# Altium PCB Plug Base.PcbDoc
Units mm, origin at the board's own origin, x right, y up, seen from the top; angles counter-clockwise.
Board outline 28.99 x 33 mm, 2 copper layers (Top Layer, Bottom Layer); 12 components, 9 nets, 44 pads, 7 vias.
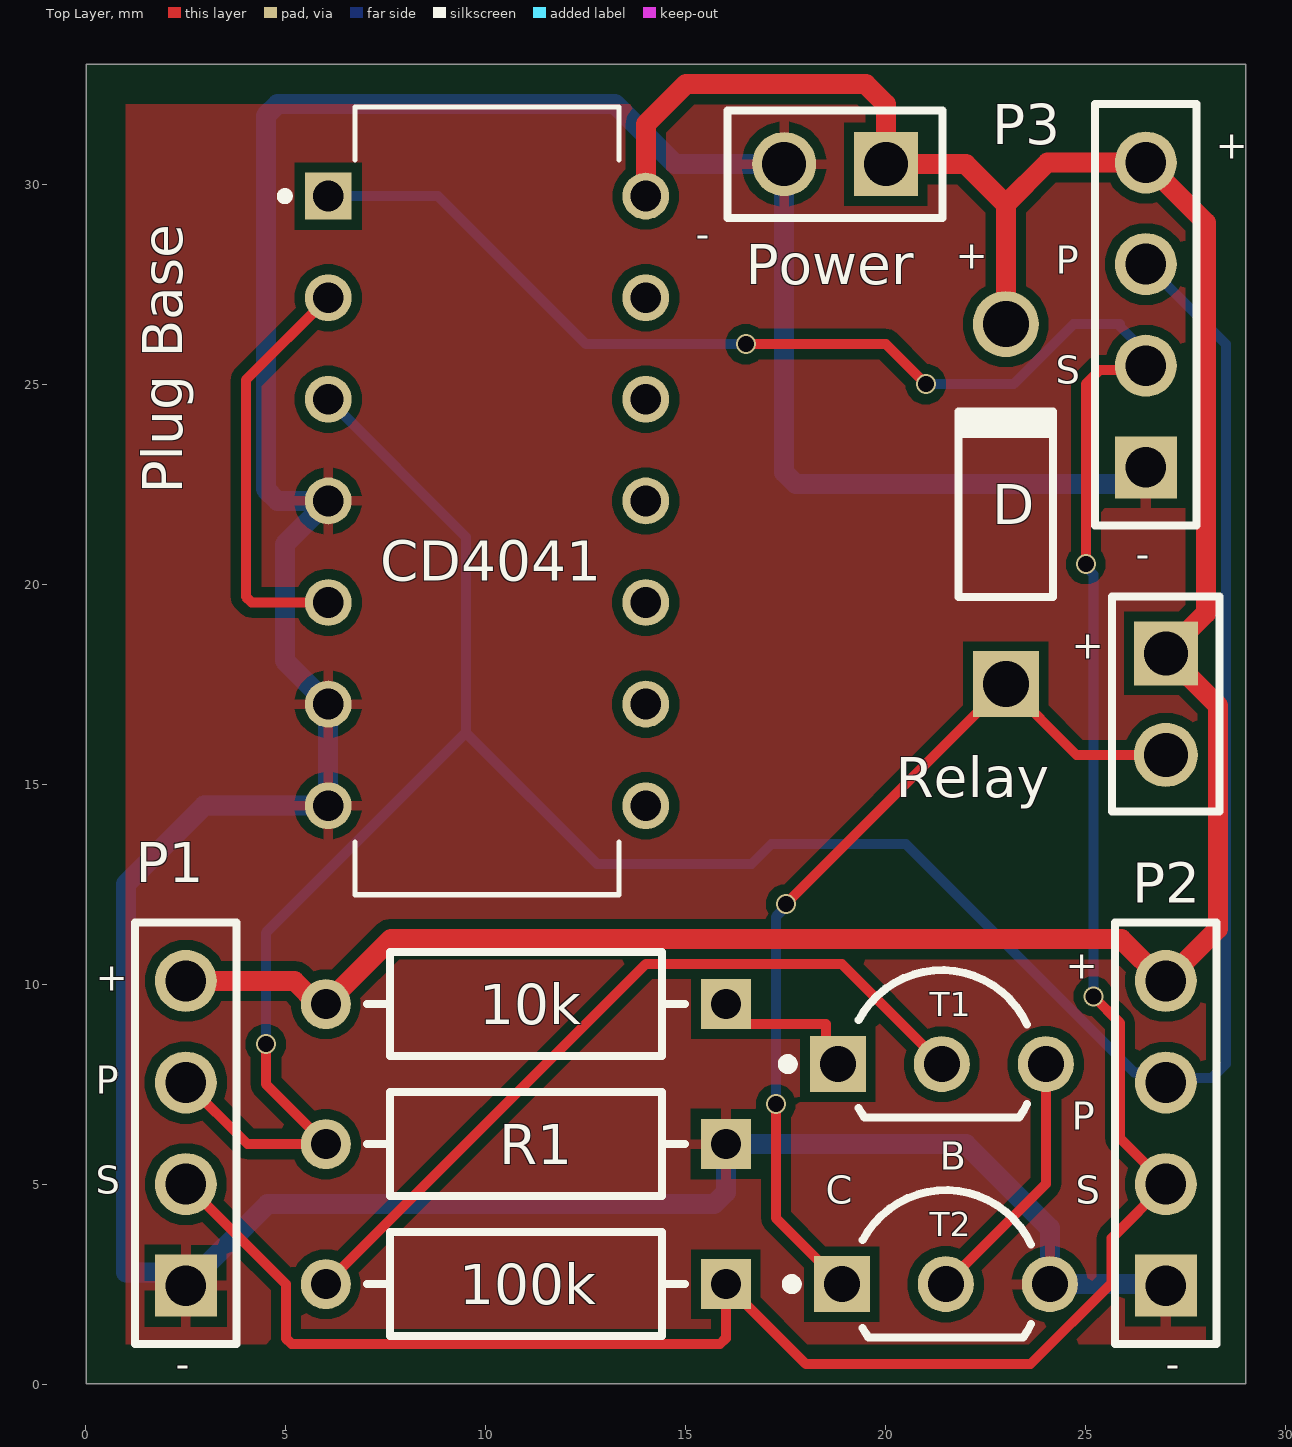
[diagram p0: Top Layer view]
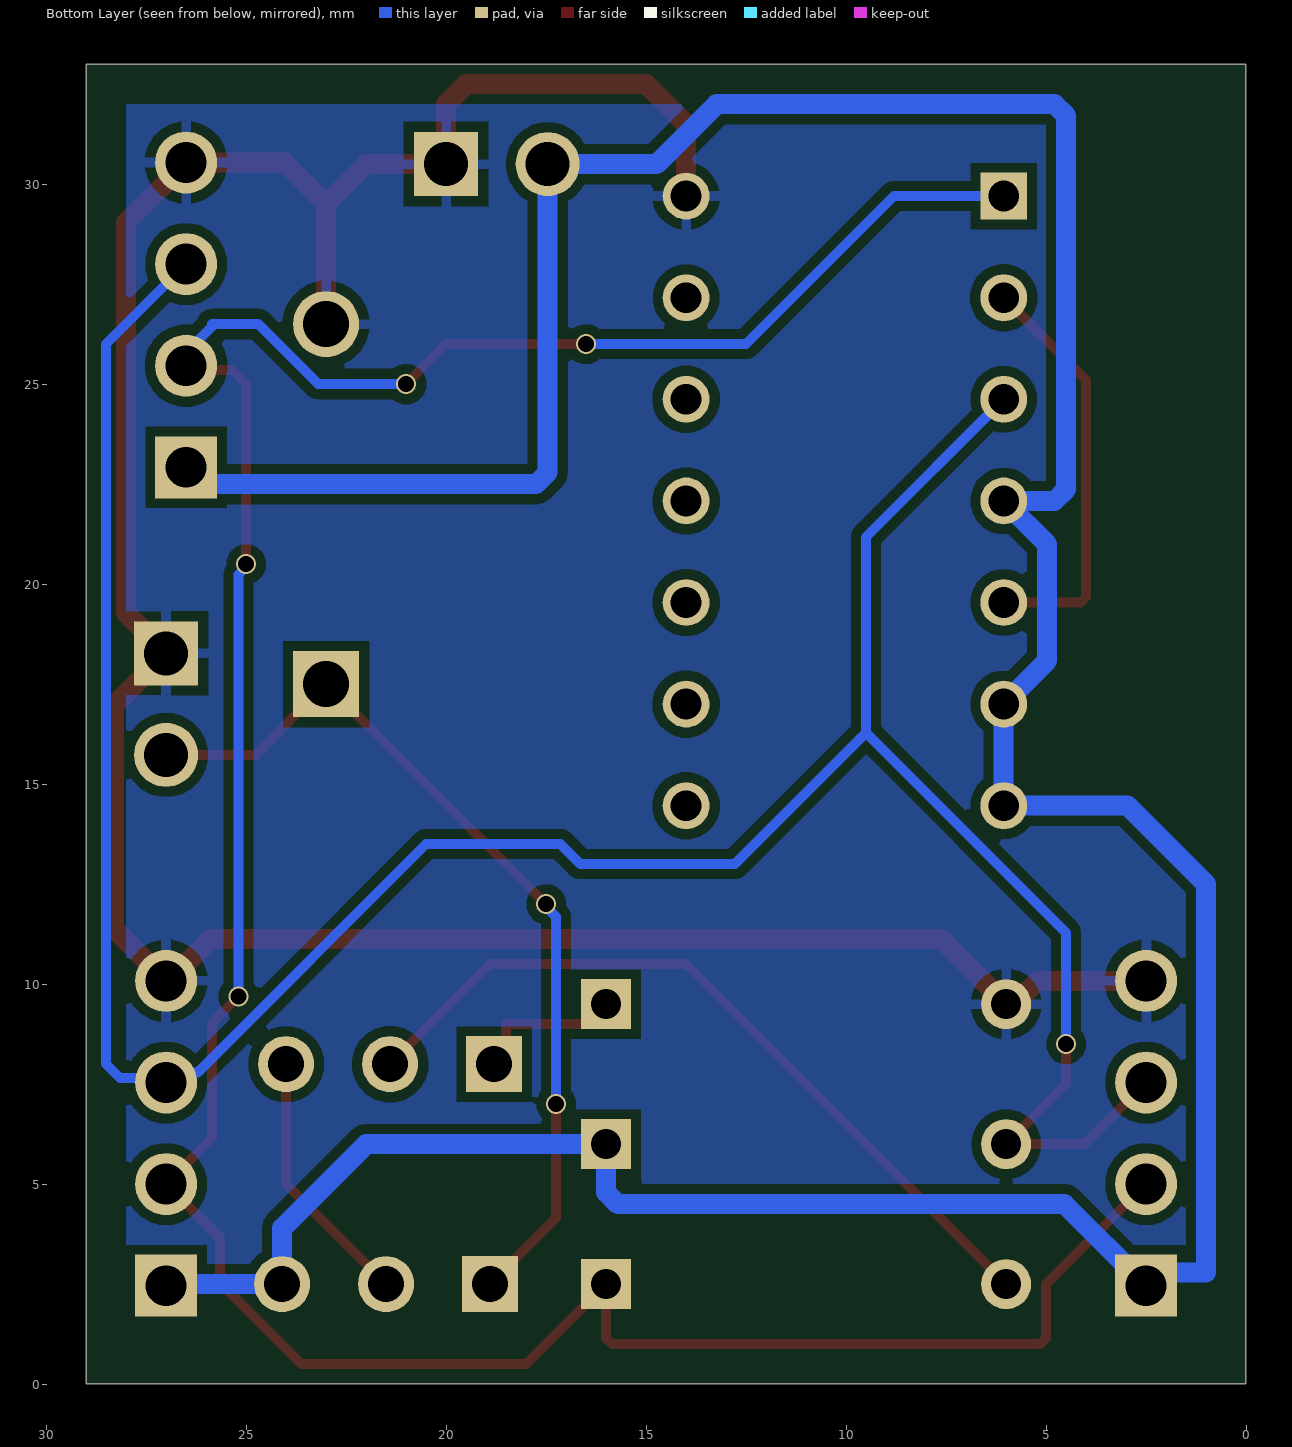
[diagram p1: Bottom Layer view, seen from below]
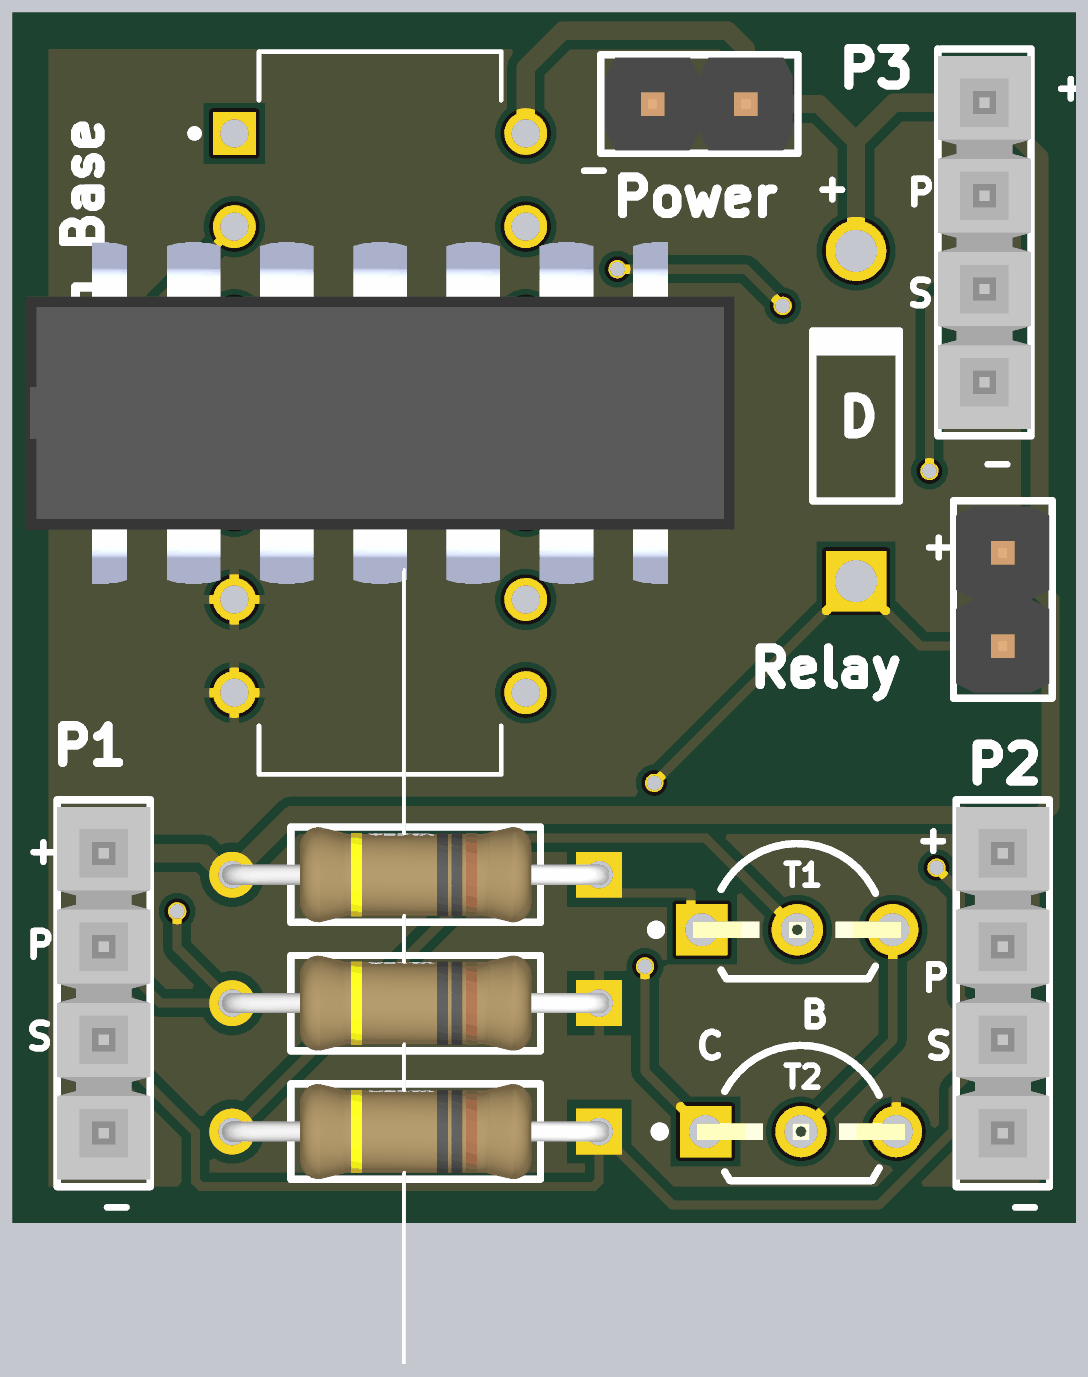
[diagram p2: 3D render of the assembled board from above, using the file's embedded part models]

## Layer stack, top to bottom
Top Solder: solder mask 0.0102, Solder Resist, Dk 3.5
Top Layer: signal copper 0.0356
Dielectric 1: dielectric 0.32, FR-4, Dk 4.8
Bottom Layer: signal copper 0.0356
Bottom Solder: solder mask 0.0102, Solder Resist, Dk 3.5

## Board outline
0.008,0.004 29,0.004 29,33 0.008,33

## Design rules (kind name [scope] priority, off if disabled: settings)
Clearance [All] p1: gap=0.25 ignorepadtopadclearanceinfootprint=FALSE
PolygonConnect [All] p1: connectstyle=Relief reliefconductorwidth=0.254 reliefentries=4 polygonreliefangle="90 Angle" airgapwidth=0.254
RoutingVias [All] p1: holewidth=0.4 width=0.5 viastyle="Through Hole" minholewidth=0.4 minwidth=0.5 maxholewidth=0.4 maxwidth=0.5
SolderMaskExpansion [All] p1: expansion=0.102 istentingtop=FALSE
Width Width_Power [(InNet('VCC') OR InNet('GND'))] p1: maxlimit=0.5 minlimit=0.5 preferedwidth=0.5
Width [All] p2: maxlimit=0.25 minlimit=0.25 preferedwidth=0.25
30 further rules are at their usual default settings.

## Components (designator, comment, footprint, x,y, rotation, side; value= is the part's Value field where it differs from the comment)
10k "CFR-25JB-52-10R" FP-CFR-25-MFG 11,9.5 r180 top
100k "CFR-25JB-52-10R" FP-CFR-25-MFG 11,2.5 r180 top
CD4041 "CD4013BEE4" DIP794W45P254L1969H508Q14 10.03,22.08 r0 top
D "1N4001-T" DIOD-DO-41-P-2_V 23,22 r90 top
P1 "TSW-104-08-L-S" SMTC-TSW-104-08-X-S 2.5,2.46 r90 top
P2 "TSW-104-08-L-S" SMTC-TSW-104-08-X-S 27,2.46 r90 top
P3 "TSW-104-08-L-S" SMTC-TSW-104-08-X-S 26.5,22.92 r90 top
Power "61300211121" 61300211121 18.73,30.5 r180 top
R1 "CFR-25JB-52-10R" FP-CFR-25-MFG 11,6 r180 top
Relay "61300211121" 61300211121 27,17 r270 top
T1 "BC337-25ZL1G" ONSC-TO-92-3-29-11_AM_BL 21.4,8 r0 top
T2 "BC337-25ZL1G" ONSC-TO-92-3-29-11_AM_BL 21.5,2.5 r0 top

## Footprints (in the part's own frame and the unit in brackets; to place one, negate y for a bottom-side part, rotate by r counter-clockwise, add the part's x,y. Pads: shape width x height; smd on the part's side, far side on the other; paste and mask are expansions set on the pad)
61300211121 [mm] "Pin Header, pitch 2.54 mm, THT, Vertical, single row, 2p"
  rect 1.6x1.6 hole 1.1: 1(-1.27,0)
  round 1.6 hole 1.1: 2(1.27,0)
  silkscreen extent -2.69,-1.35 2.69,1.35, body extent -2.54,-1.27 2.54,1.27, height 8.57
DIOD-DO-41-P-2_V [mm] "2-Leads, Axial Lead, Body 4.635x2.36mm, Pin Spacing 9mm"
  rect 1.65x1.65 hole 1.15: 1(-4.5,0)
  round 1.65 hole 1.15: 2(4.5,0)
  silkscreen extent -2.32,-1.18 2.32,1.18, body extent -4.93,-1.18 4.93,1.18, height 2.35
DIP794W45P254L1969H508Q14 [mm]
  rect 1.17x1.17 hole 0.77: 1(-3.97,7.62)
  round 1.17 hole 0.77: 2(-3.97,5.08) 3(-3.97,2.54) 4(-3.97,0) 5(-3.97,-2.54) 6(-3.97,-5.08) 7(-3.97,-7.62) 8(3.97,-7.62) 9(3.97,-5.08) 10(3.97,-2.54) 11(3.97,0) 12(3.97,2.54) 13(3.97,5.08) 14(3.97,7.62)
  silkscreen extent -5.15,-9.84 3.3,9.84, body extent -9.65,-5.46 9.65,5.46, height 5.08
FP-CFR-25-MFG [mm]
  rect 1.25x1.25 hole 0.75 paste-1000 mask+0: 1(-5,0)
  round 1.25 hole 0.75 paste-1000 mask+0: 2(5,0)
  silkscreen extent -3.98,-1.3 3.98,1.3, body extent -5.72,-1.4 5.72,1.4, height 0.25
ONSC-TO-92-3-29-11_AM_BL [mm] "TO, 3-Leads, Body Dia 4.7mm, Pitch 2.6mm"
  rect 1.4x1.4 hole 0.9: 1(-2.6,0)
  round 1.4 hole 0.9: 2(0,0) 3(2.6,0)
  silkscreen extent -3.97,-1.34 2.13,2.35, body extent -2.84,-1.34 2.84,2.35, height 5.33
SMTC-TSW-104-08-X-S [mm] ".025 SQ Post Terminal Strip Assembly, 1x4 Pins, Vertical, 2.54mm Pitch, Male"
  rect 1.55x1.55 hole 1.02: 1(0,0)
  round 1.55 hole 1.02: 2(2.54,0) 3(5.08,0) 4(7.62,0)
  silkscreen extent -1.46,-1.27 9.08,1.27, body extent -1.27,-1.27 8.89,1.27, height 8.38

## Part data
10k 100k R1: library part CMP-03413-000009-1, "RES 10 OHM 1/4W 5% AXIAL", Case/Package=Axial, Max Operating Temperature=155°C, Max Power Dissipation=250mW, Min Operating Temperature=-55°C, Package Quantity=200, Resistance=10R, Resistor Type="Carbon Film", Temperature Coefficient=500ppm/°C, Tolerance=5%, Length=0.248inch, Number of Terminations=2, Packaging=Bulk, RoHS Compliant=Yes, Series="Carbon Film"
CD4041: "CMOS Dual D-Type Flip Flop 14-PDIP -55 to 125", Package="PDIP-14 Texas Instruments", Availability="In Stock", Check_prices=https://www.snapeda.com/parts/CD4013BEE4/Texas+Instruments/view-part/?ref=eda, MF="Texas Instruments", MP=CD4013BEE4, Price=None, Purchase-URL=https://pricing.snapeda.com/search/part/CD4013BEE4/?ref=eda, SnapEDA_Link=https://www.snapeda.com/parts/CD4013BEE4/Texas+Instruments/view-part/?ref=snap
D: library part CMP-0639-00006-2, "1.0 A Rectifier, 15 pF, 50 V, -65 to 150 degC, 2-Pin DO-41 Plastic, RoHS, Tape and Reel", Manufacturer="Diodes Inc", Max. Average Rectified Current IO (A)=1, Operating Temperature Range (degC)="-65 to 150", ComponentLink1Description="Manufacturer URL", ComponentLink1URL=http://diodes.com/, ComponentLink2Description=Datasheet, ComponentLink2URL=http://diodes.com/datasheets/ds28002.pdf, CT (pF)=15, DatasheetVersion="Rev. 8-2", Max. IFSM (A)=30, Max. IR (uA)=5, Mounting Technology="Through Hole", PackageDescription="2-Pin Axial Lead, Body 4.635 x 2.36 mm, Lead Spread 25.4 mm", PackageReference=DO-41-P-2, Packing="Tape and Reel", PartNumber=1N4001-T, RoHS=TRUE, VF (V)=1, VRRM (V)=50
P1 P2 P3: library part CMP-1024-00358-1, "0.025\" SQ Post Header, Through-hole, Vertical, -55 to 125 degC, 2.54 mm Pitch, 4-Pin, Male, RoHS", Manufacturer=Samtec, Temperature Range="-55 to 125 degC", ComponentLink1Description="Manufacturer URL", ComponentLink1URL=http://www.samtec.com, ComponentLink2Description=Datasheet, ComponentLink2URL=http://www.samtec.com/documents/webfiles/pdf/TSW_TH.PDF, ComponentLink3Description="Package Specification", ComponentLink3URL=http://www.samtec.com/documents/webfiles/cpdf/TSW-XXX-XX-XXX-X-XX-XXX-MKT.pdf, DatasheetVersion=F-214, Mounting Technology=Through-hole, Orientation=Vertical, PackageDescription=".025[0.64] SQ. Post Terminal Strip Assembly", PackageReference=TSW-104-08-X-S, PackageVersion="DM, 8/1988", PartNumber=TSW-104-08-L-S, Pitch="2.54 mm", RoHS=True
Power Relay: library part CMP-1712-00002-4, "THT Vertical Pin Header WR-PHD, Pitch 2.54 mm, Single Row, 2 pins", Contact Resistance=20mOhm, Manufacturer="Wurth Elektronik", Operating Temperature=-40to105degC, Rated Current=3A, Withstanding Voltage=500VAC, Working Voltage=250VAC, Datasheet URL=https://katalog.we-online.de/em/datasheet/6130xx11121.pdf, Gender=Male, Manufacturer URL=http://www.we-online.de, Mounting Technology=THT, Orientation=Vertical, Package Reference=61300211121, Packaging=Bag, Part Number=61300211121, Pin Number=2, Pitch=2.54mm, Publisher=WurthElektronik, Row Number=Single
T1 T2: library part CMP-1048-01574-1, "Amplifier Transistor, NPN Silicon, 3-Pin TO-92, Pb-Free, Ammo Box", Manufacturer="On Semiconductor", ComponentLink1Description="Manufacturer URL", ComponentLink1URL=http://www.onsemi.com/, ComponentLink2Description=Datasheet, ComponentLink2URL=http://www.onsemi.com/pub_link/Collateral/BC337-D.PDF, ComponentLink3Description="Package Specification", ComponentLink3URL=http://www.onsemi.com/pub_link/Collateral/MAC97-D.PDF, DatasheetVersion="Rev. 8", IC Continuous (A)=0.8, Mounting Technology="Through Hole", PackageDescription="3-Pin Transistor Outline, Body 4.825 x 3.685 mm, Pitch 1.27 mm", PackageReference=TO-92-3-29-11_AM_BL, PackageVersion="Rev. AM", Packing="Ammo Box", PartNumber=BC337-25ZL1G, Polarity=NPN, RoHS=TRUE

## Via types
v1: diameter 0.5, hole 0.4, Top Layer to Bottom Layer, 7 vias

## Nets (pads, with @x,y where several pads share a name; then routed paths per layer and width w, separated by ;. In a path a pad name is that pad's centre, name@x,y a point inside that pad or via, vN(x,y) a via of type N, cw(c..) or ccw(c..) an arc to the next point about the centre after c; other vN are vias at no path point)
GND: CD4041.4 CD4041.6 CD4041.7 P1.1 P2.1 P3.1 Power.2 R1.1 T2.3 | length 96.5
  Bottom Layer w0.5: P3.1 26.08,22.5 17.753,22.5 17.46,22.793 Power.2 14.734,30.5 13.234,32 4.793,32 4.5,31.707 4.5,22.373 4.793,22.08 CD4041.4 4.975,20.995 4.975,18.085 CD4041.6 CD4041.7 2.96,14.46 1,12.5 1,2.793 2.167,2.793 P1.1 4.54,4.5 15.707,4.5 16,4.793 R1.1 22,6 24.1,3.9 T2.3 26.96,2.5 P2.1
Net10k_1: 10k.1 T1.1 | length 3.8
  Top Layer w0.25: 10k.1 16.5,9 18.5,9 18.5,8.3 T1.1
Net100k_2: 100k.2 T1.2 | length 19.7
  Top Layer w0.25: 100k.2 14,10.5 18.9,10.5 T1.2
NetCD4041_2: CD4041.2 CD4041.5 | length 10.4
  Top Layer w0.25: CD4041.5 4.146,19.54 4,19.686 4,25.1 CD4041.2
NetD_1: D.1 Relay.2 T2.1 | length 22.8
  Top Layer w0.25: v1(17.25,7) 17.25,4.15 T2.1 ; v1(17.5,12) D.1 24.77,15.73 Relay.2
  Bottom Layer w0.25: v1(17.25,7) 17.25,11.682 17.5,11.932 v1(17.5,12)
NetT1_3: T1.3 T2.2 | length 6.5
  Top Layer w0.25: T2.2 24,5 T1.3
PULSE: CD4041.3 P1.3 P2.3 P3.3 R1.2 | length 70.9
  Top Layer w0.25: P1.3 4.04,6 R1.2 4.5,7.5 v1(4.5,8.5)
  Bottom Layer w0.25: v1(4.5,8.5) 4.5,11.284 9.5,16.284 ; CD4041.3 9.5,21.18 9.5,16.284 ; P3.3 28.5,26 28.5,8 28.15,7.65 27.11,7.65 P2.3 26.751,7.789 26.211,7.789 20.5,13.5 17.145,13.5 16.645,13 12.784,13 9.5,16.284
STATUS: 100k.1 CD4041.1 P1.2 P2.2 P3.2 | length 77.9
  Top Layer w0.25: P1.2 5,2.5 5,1.146 5.146,1 15.854,1 16,1.146 100k.1 18,0.5 23.62,0.5 25.648,2.528 25.648,3.648 P2.2 25.85,6.15 25.85,9.034 v1(25.192,9.692) ; v1(16.5,26) 20,26 v1(21,25) ; v1(25,20.5) 25,25 25.35,25.35 26.39,25.35 P3.2
  Bottom Layer w0.25: CD4041.1 8.8,29.7 12.5,26 v1(16.5,26) ; v1(21,25) 23.197,25 24.697,26.5 25.854,26.5 25.854,26.44 26.5,25.793 P3.2 ; v1(25,20.5) 25,20.432 25.192,20.24 v1(25.192,9.692)
VCC: 10k.2 CD4041.14 D.2 P1.4 P2.4 P3.4 Power.1 Relay.1 | length 68.7
  Top Layer w0.5: P1.4 5.217,10.08 5.797,9.5 10k.2 7.625,11.125 25.888,11.125 26.933,10.08 P2.4 28.3,11.38 28.3,16.97 Relay.1 28,19.27 28,29.04 P3.4 24.04,30.54 23,29.5 ; CD4041.14 14,31.5 15,32.5 19.5,32.5 20,32 Power.1 22,30.5 23,29.5 ; D.2 23,29.5
pads on no net: CD4041.8 CD4041.9 CD4041.10 CD4041.11 CD4041.12 CD4041.13

## Polygon pours and split planes (outlines as drawn)
GND on Top Layer "GND_L01_P000" (solid, remove dead copper, pour order 0): 1,32 1,1 28,1 28,32
VCC on Bottom Layer "VCC_L02_P001" (solid, remove dead copper, pour order 1): 1,32 1,1 28,1 28,32

## Silkscreen, mask and mechanical layers (free items; w line width, h text height)
Top Overlay:
  text "+" at 28.254,30.637 h0.7
  text "-" at 15.254,28.404 h0.7
  text "+" at 21.754,27.887 h0.7
  text "P" at 24.254,27.754 h0.7
  text "S" at 24.254,25.004 h0.7
  text "Plug Base" at 2.413,22.254 h1 r90
  text "-" at 26.254,20.404 h0.7
  text "+" at 24.654,18.137 h0.7
  text "+" at 24.504,10.137 h0.7
  text "+" at 0.254,9.837 h0.7
  text "P" at 0.254,7.254 h0.7
  text "P" at 24.654,6.354 h0.7
  text "B" at 21.354,5.354 h0.7
  text "S" at 0.254,4.754 h0.7
  text "C" at 18.504,4.504 h0.7
  text "S" at 24.754,4.504 h0.7
  text "-" at 2.254,0.154 h0.7
  text "-" at 27.004,0.154 h0.7